# EAGLE board J2 Retrofit nogp (EAGLE 9.1.2)
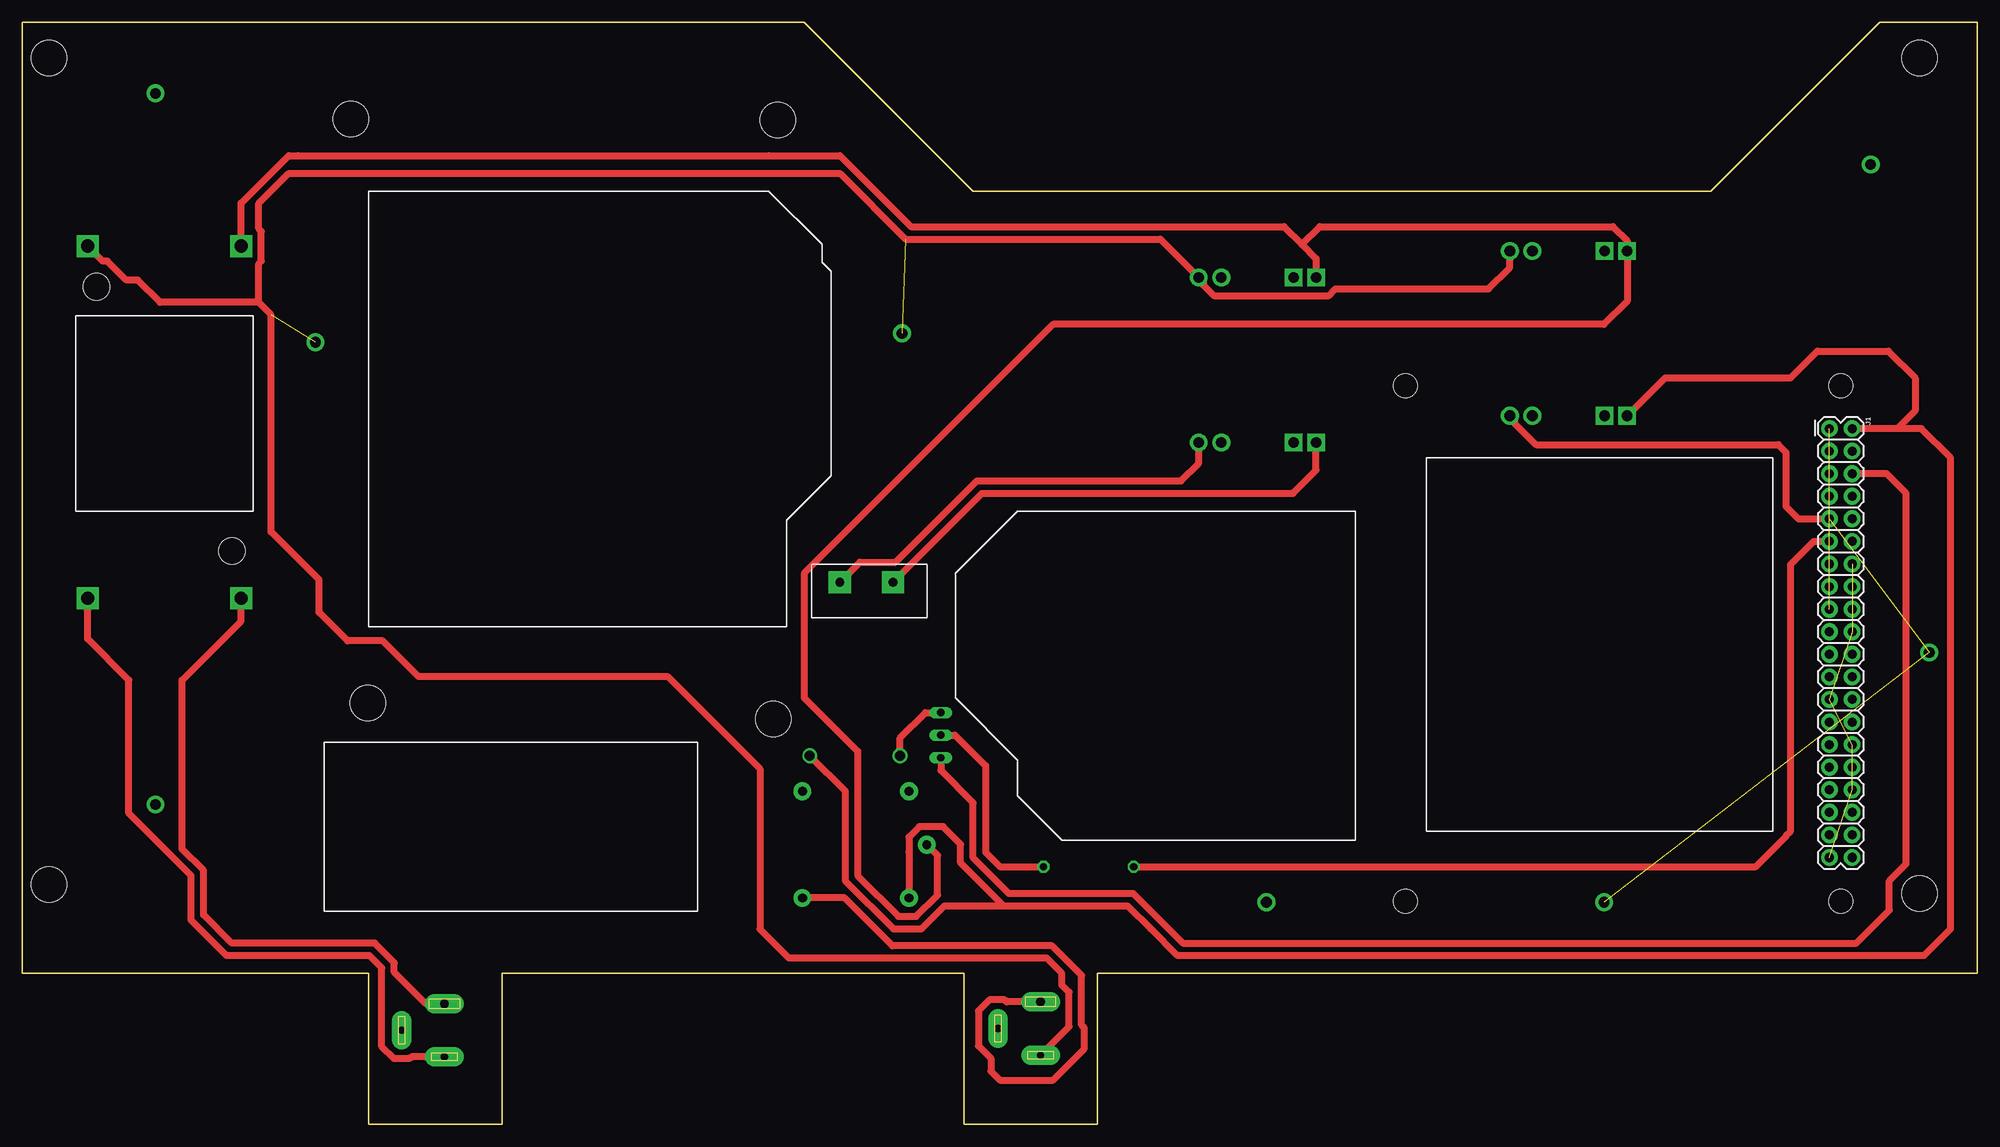
[diagram p0: board, top side]
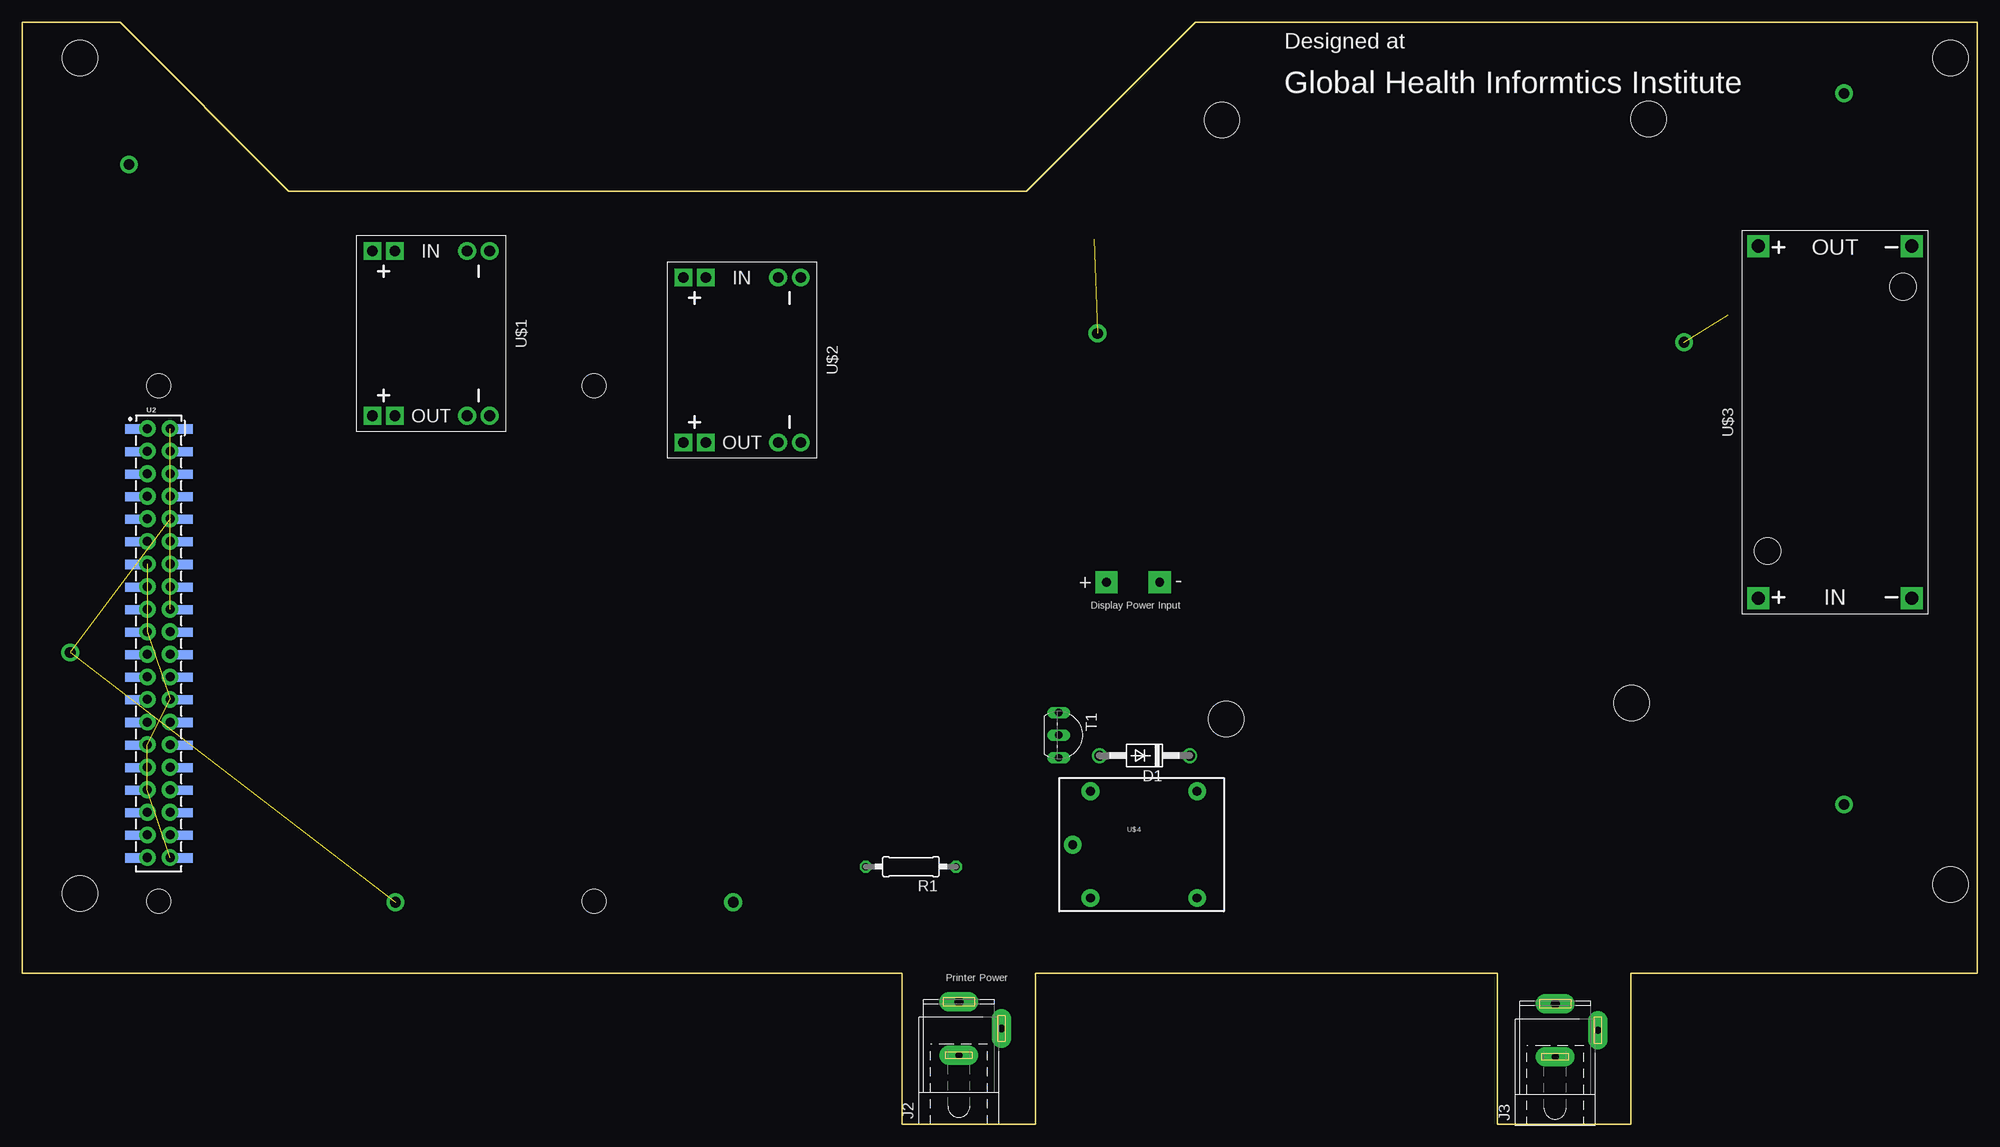
[diagram p1: board, bottom side, seen from below]

Size 220 x 124 mm. Coordinates in mm from the lower left corner, seen from the top.
Outline: 0,17 0,124 88,124 107,105 190,105 209,124 220,124 220,17 121,17 121,0 106,0 106,17 54,17 54,0 39,0 39,17 0,17
Copper layers (1*16): Top 0.035mm / dielectric 1.5mm / Bottom 0.035mm
Design rules "default": minimum track width 6mil, minimum drill 0.35mm, track to track 6mil, track to pad 6mil, pad to pad 6mil, via to via 6mil, smd to smd 6mil, copper to edge 40mil, drill to drill 6mil, minimum pad ring 10mil, minimum via ring 8mil, stop-mask expansion 4mil, vias tented up to drill 0mil, thermal gap 10mil
Net classes: 0 default: width 0.762 mm, drill 0.762 mm, clearance 0.635 mm
Holes 4 mm at 3,27 3,120 213.5,120 213.5,26 38.9,47.4 84.5,45.6 37,113.1 85,113

## Footprints (pad centres in the part's own frame; a part is rotated, then mirrored left to right if it is on the bottom)
DO41-10 = drill 1.118: A 5.08,0; C -5.08,0
2X20 = drill 1.016 pad 1.88: 1 0,0; 2 0,2.54; 3 2.54,0; 4 2.54,2.54; 5 5.08,0; 6 5.08,2.54; 7 7.62,0; 8 7.62,2.54; 9 10.16,0; 10 10.16,2.54; 11 12.7,0; 12 12.7,2.54; 13 15.24,0; 14 15.24,2.54; 15 17.78,0; 16 17.78,2.54; 17 20.32,0; 18 20.32,2.54; 19 22.86,0; 20 22.86,2.54; 21 25.4,0; 22 25.4,2.54; 23 27.94,0; 24 27.94,2.54; 25 30.48,0; 26 30.48,2.54; 27 33.02,0; 28 33.02,2.54; 29 35.56,0; 30 35.56,2.54; 31 38.1,0; 32 38.1,2.54; 33 40.64,0; 34 40.64,2.54; 35 43.18,0; 36 43.18,2.54; 37 45.72,0; 38 45.72,2.54; 39 48.26,0; 40 48.26,2.54
SPC4078 = drill 0.8 pad 2.184 long: 1 -3,0; 2 0,-4.8 | drill 1 pad 2.184 long: 3 3,0
0207/10 = drill 0.813 octagon: 1 -5.08,0; 2 5.08,0
TO92-EBC-OVAL = drill 0.813 long: B 0,-1.27; C 2.54,-1.27; E -2.54,-1.27
RASPBERRY_PI_SHIELD_HOLES = smd 1.02 x 1.87: 1 8.382,7.686; 2 8.382,1.929; 3 10.922,7.686; 4 10.922,1.929; 5 13.462,7.686; 6 13.462,1.929; 7 16.002,7.686; 8 16.002,1.929; 9 18.542,7.686; 10 18.542,1.929; 11 21.082,7.686; 12 21.082,1.929; 13 23.622,7.686; 14 23.622,1.929; 15 26.162,7.686; 16 26.162,1.929; 17 28.702,7.686; 18 28.702,1.929; 19 31.242,7.686; 20 31.242,1.929; 21 33.782,7.686; 22 33.782,1.929; 23 36.322,7.686; 24 36.322,1.929; 25 38.862,7.686; 26 38.862,1.929; 27 41.402,7.686; 28 41.402,1.929; 29 43.942,7.686; 30 43.942,1.929; 31 46.482,7.686; 32 46.482,1.929; 33 49.022,7.686; 34 49.022,1.929; 35 51.562,7.686; 36 51.562,1.929; 37 54.102,7.686; 38 54.102,1.929; 39 56.642,7.686; 40 56.642,1.929 | hole 2.75: 3.512,4.775; 61.512,4.775; 61.512,53.775; 3.512,53.775
DC-DC-STEP-DOWN-MP1584 = drill 1.2 pad 2 square: IN+.1 -9.271,-4.064; IN+.2 -9.271,-6.604; OUT+.1 9.271,-4.064; OUT+.2 9.271,-6.604 | drill 1.2 pad 2: IN-.1 -9.271,6.604; IN-.2 -9.271,4.064; OUT-.1 9.271,6.604; OUT-.2 9.271,4.064
DC-DC-STEP-DOWN-LM2596 = drill 1.5 pad 2.5 square: IN+ -19.812,8.636; IN- -19.812,-8.636; OUT+ 19.812,8.636; OUT- 19.812,-8.636 | hole 3: -14.478,7.62; 15.24,-7.62
SRD-05VDC-SL-C = drill 1 pad 2: COIL0 -5.39,-6.12; COIL1 -5.39,5.88; SWCLOSED 6.61,-6.12; SWCOMMON -7.39,-0.12; SWOPEN 6.61,5.88

## Placement (x,y rotation side)
D1  1N4004  [DO41-10]  93.7,41.5 180 bottom
J1  RASPBERRYPI-40-PIN-GPIO_PTH_NO_SHROUD  [2X20]  203.37,78.29 270 top
J2  [SPC4078]  114.6,10.8 90 bottom
J3  [SPC4078]  47.5,10.6 90 bottom
R1  [0207/10]  120,29 180 bottom
T1  2N2222  [TO92-EBC-OVAL]  102.1,43.8 270 bottom
U2  RASPBERRY_PI_40SMD  [RASPBERRY_PI_SHIELD_HOLES]  209.41,86.62 270 bottom
U$1  DC-DC-STEP-DOWN-MP1584  [DC-DC-STEP-DOWN-MP1584]  174,89 270 bottom
U$2  DC-DC-STEP-DOWN-MP1584  [DC-DC-STEP-DOWN-MP1584]  139,86 270 bottom
U$3  DC-DC-STEP-DOWN-LM2596  [DC-DC-STEP-DOWN-LM2596]  16,79 90 bottom
U$4  RELAYPTH  [SRD-05VDC-SL-C]  94.4,31.6 0 bottom

## Library data of the parts
D1 = diode
J1 U2 = SparkFun-Connectors
J2 J3 = con-jack; OC_FARNELL: unknown; OC_NEWARK: unknown
R1 = resistor
T1 = adafruit
U$1 = GHIdiy-modules
U$2 U$3 = diy-modules
U$4 = SRD-Relay

## Nets
3.3V: J1.1 J1.17
5V: J1.4
GND: J1.14 J1.20 J1.25 J1.30 J1.34 J1.39
N$1: J3.1 U$3.IN-
N$2: U$2.OUT-.1
N$3: J3.3 U$3.IN+
N$4: U$2.OUT+.2
N$5: U$1.IN+.2 U$2.IN+.2 U$3.OUT+ U$4.SWCOMMON
N$6: J1.11 R1.2
N$7: J1.6 T1.C
N$8: J2.1 U$1.IN-.1 U$2.IN-.1 U$3.OUT-
N$9: D1.C J1.2 U$1.OUT+.2 U$4.COIL0
N$10: J1.9 U$1.OUT-.1
N$11: D1.A T1.E
N$16: R1.1 T1.B
N$18: J2.3 U$4.SWCLOSED

## Tracks (layer width: path | path; a pad name or v marks a point on that pad's centre or on a via)
3.3V  (1 unrouted)
GND  (5 unrouted)
N$1
  Top 0.762: J3.1 43.77,7.6 43.57,7.4 41.83,7.4 40.47,8.75 40.47,17.61 39.08,19 23,19 19,23 19,28 12,35 12,50 7.36,54.64 U$3.IN-
N$2  (via drill 1 pad 2.5)
  Top 0.762: v92,61 94.27,63.27 98.29,63.27 107.42,72.4 130.4,72.4 132.4,74.4 U$2.OUT-.1
N$3
  Top 0.762: J3.3 45.4,13.6 41.87,17.13 41.87,18.19 39.66,20.4 23.58,20.4 20.4,23.58 20.4,28.58 18,30.98 18,50 24.64,56.64 U$3.IN+
N$4  (via drill 1 pad 2.5)
  Top 0.762: v98,61 108,71 143,71 145.6,73.6 U$2.OUT+.2
N$5
  Top 0.762: 144,99 142,101 100,101 98,103 92,109 84,109 31,109 30,109 24.64,103.64 U$3.OUT+ | 144,99 145.6,97.4 U$2.IN+.2 | 144,99 | 144,99 146,101 179,101 180.6,99.4 U$1.IN+.2 180.6,92.6 178,90 116,90 88,62 88,48 94,42 94,28 98.61,23.39 100.59,23.39 103,25.8 103,30.27 U$4.SWCOMMON
N$6
  Top 0.762: J1.11 201.59,65.59 199,63 199,33 198.47,32.47 198.47,32.39 195.08,29 R1.2
N$7
  Top 0.762: J1.6 209.79,73.21 212,71 212,29.3 210.1,27.41 210.1,24.1 206.4,20.4 130.6,20.4 125,26 111,26 107,30 107,36.19 103.37,39.82 T1.C
N$8  (via drill 1.2 pad 2)  (2 unrouted)
  Top 0.762: J2.1 117.8,11 117.8,14.87 117,15.67 117,17 115.3,18.7 86.28,18.7 83,21.98 83,40 72.6,50.4 44.58,50.4 40.58,54.4 36.6,54.4 33.4,57.6 33.4,61.28 28,66.68 28,91.08 26.61,92.47 | U$1.IN-.1 167.4,96.4 165,94 147.77,94 147.03,93.25 134.1,93.25 132.92,94.44 132.92,94.75 U$2.IN-.1 128.06,99.6 99.42,99.6 92.02,107 30,107 26.61,103.61 26.61,100.78 26.9,100.48 26.9,97.14 26.61,96.85 26.61,92.47 | 26.61,92.47 15.53,92.47 13,95 11.72,95 9.58,97.14 9.04,97.14 U$3.OUT-
  other vias: 33,88 99,89
N$9
  Top 0.762: 211,78.29 213.71,78.29 217,75 217,22 214,19 130,19 127,22 124.4,24.6 113,24.6 | 211,78.29 J1.2 | U$1.OUT+.2 184.88,84 199,84 202,87 210,87 213,84 213,80.29 211,78.29 | 113,24.6 110.42,24.6 105.6,29.42 105.6,31.52 103.62,33.5 100.95,33.5 99.77,32.31 99.77,30.64 99.79,30.63 U$4.COIL0 | D1.C 92.6,37.52 92.6,27.42 98.03,22 101.17,22 103.78,24.6 113,24.6
N$10  (via drill 1.2 pad 2)  (2 unrouted)
  Top 0.762: U$1.OUT-.1 167.92,79.2 167.92,78.89 170.34,76.47 197.61,76.47 198.47,75.61 198.47,69.53 199.87,68.13 J1.9
  other vias: 214.6,53.1 178,25
N$11
  Top 0.762: D1.A 98.78,43.5 101.62,46.34 T1.E
N$12  (via drill 1.2 pad 2)
  other vias: 15,116
N$13  (via drill 1.2 pad 2)
  other vias: 15,36
N$14  (via drill 1.2 pad 2)
  other vias: 140,25
N$15  (via drill 1.2 pad 2)
  other vias: 208,108
N$16
  Top 0.762: R1.1 110,29 108.4,30.6 108.4,40.36 104.96,43.8 T1.B
N$18
  Top 0.762: J2.3 110.77,13.8 110.57,14 108.83,14 107.59,12.77 107.59,8.84 109,7.43 109,6 110,5 116,5 119.53,8.53 119.53,10.85 119.2,11.18 119.2,16.78 115.88,20.1 97.93,20.1 92.54,25.48 U$4.SWCLOSED

## Text on the board
bNames: Designed at | Global Health Informtics Institute | - | + | Display Power Input | Printer Power